# EAGLE board Analog_Scaling_Circuit_Manual (EAGLE 9.3.0)
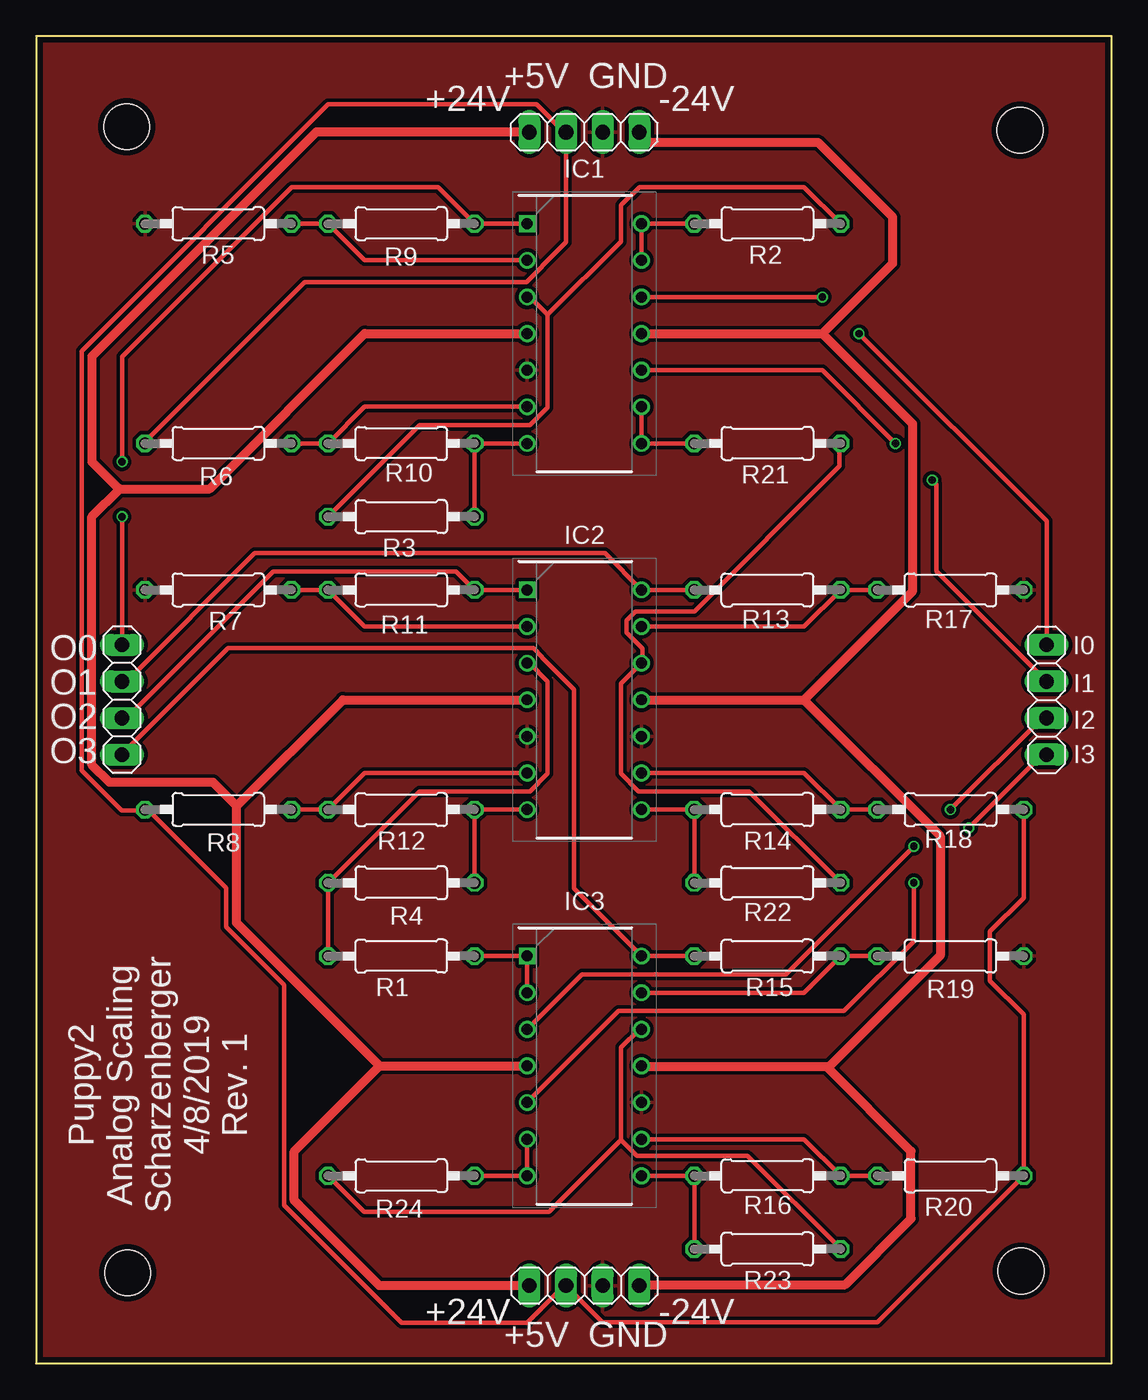
[diagram p0: board, top side]
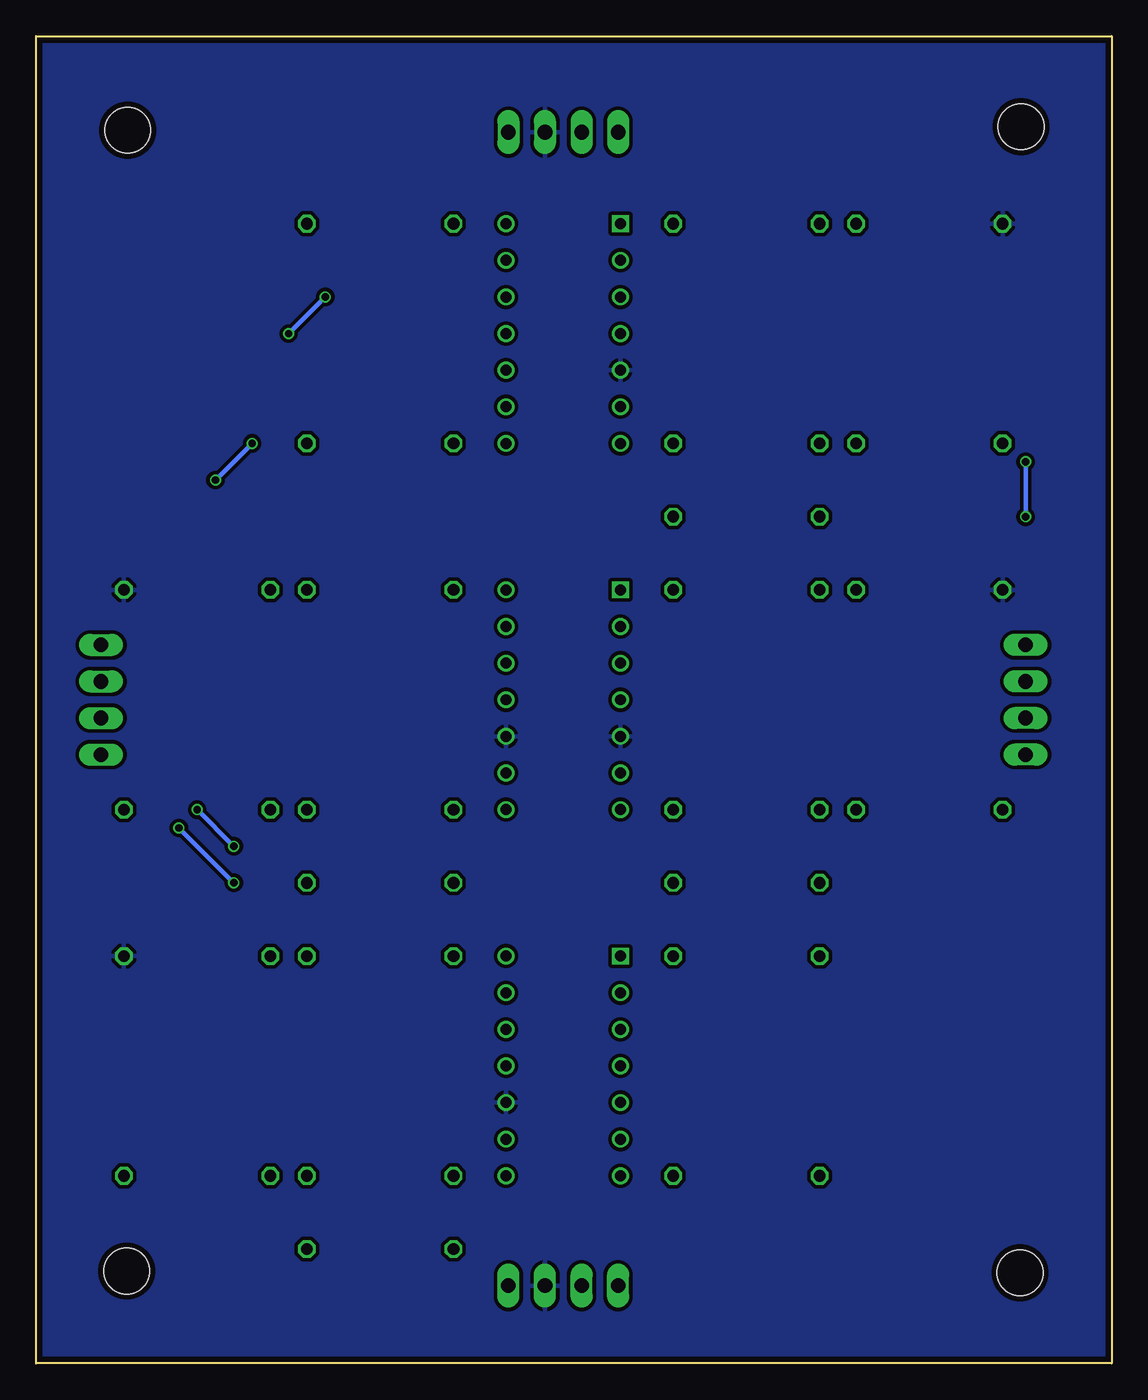
[diagram p1: board, bottom side, seen from below]

Size 74.61 x 92.08 mm. Coordinates in mm from the lower left corner, seen from the top.
Outline: 0,0 74.61,0 74.61,92.08 0,92.08 0,0
Copper layers (1*16): Top 0.035559375mm / dielectric 1.6mm / Bottom 0.035559375mm
Design rules "oshpark-2layer": minimum track width 6mil, minimum drill 10mil, track to track 6mil, track to pad 6mil, pad to pad 6mil, via to via 6mil, smd to smd 6mil, copper to edge 15mil, drill to drill 6mil, minimum pad ring 5mil, minimum via ring 5mil, stop-mask expansion 2.5mil, vias tented up to drill 0mil, thermal gap 10mil
Net classes: 0 default: width 0.305 mm, drill 0.508 mm, clearance 0.254 mm
Holes 3.17 mm at 6.35,6.29 68.33,6.41 6.29,85.79 68.26,85.53

## Footprints (pad centres in the part's own frame; a part is rotated, then mirrored left to right if it is on the bottom)
DIP794W56P254L1905H533Q14N = drill 0.759 pad 1.159 square: 1 -3.969,7.62 | drill 0.759 pad 1.159: 2 -3.969,5.08; 3 -3.969,2.54; 4 -3.969,0; 5 -3.969,-2.54; 6 -3.969,-5.08; 7 -3.969,-7.62; 8 3.969,-7.62; 9 3.969,-5.08; 10 3.969,-2.54; 11 3.969,0; 12 3.969,2.54; 13 3.969,5.08; 14 3.969,7.62
1X04 = drill 1.016 long: 1 -3.81,0; 2 -1.27,0; 3 1.27,0; 4 3.81,0
0207/10 = drill 0.813 octagon: 1 -5.08,0; 2 5.08,0

## Placement (x,y rotation side)
IC1  LM324N  [DIP794W56P254L1905H533Q14N]  38.04,71.44 0 top
IC2  LM324N  [DIP794W56P254L1905H533Q14N]  38.04,46.04 0 top
IC3  LM324N  [DIP794W56P254L1905H533Q14N]  38.04,20.64 0 top
JP1  [1X04]  5.97,46.04 270 top
JP2  [1X04]  38.04,85.41 180 top
JP3  [1X04]  38.04,5.4 0 top
JP4  [1X04]  70.1,46.04 90 top
R1  3.3 kO  [0207/10]  25.34,28.26 0 top
R2  3.3 kO  [0207/10]  50.74,79.06 180 top
R3  4.7 kO  [0207/10]  25.34,58.74 180 top
R4  4.7 kO  [0207/10]  25.34,33.34 180 top
R5  3.3 kO  [0207/10]  12.64,79.06 180 top
R6  33 kO  [0207/10]  12.64,63.82 180 top
R7  3.3 kO  [0207/10]  12.64,53.66 180 top
R8  33 kO  [0207/10]  12.64,38.42 180 top
R9  4.7 kO  [0207/10]  25.34,79.06 180 top
R10  5.6 kO  [0207/10]  25.34,63.82 0 top
R11  4.7 kO  [0207/10]  25.34,53.66 180 top
R12  5.6 kO  [0207/10]  25.34,38.42 0 top
R13  4.7 kO  [0207/10]  50.74,53.66 0 top
R14  5.6 kO  [0207/10]  50.74,38.42 0 top
R15  4.7 kO  [0207/10]  50.74,28.26 0 top
R16  5.6 kO  [0207/10]  50.74,13.02 0 top
R17  3.3 kO  [0207/10]  63.44,53.66 0 top
R18  33 kO  [0207/10]  63.44,38.42 180 top
R19  3.3 kO  [0207/10]  63.44,28.26 0 top
R20  33 kO  [0207/10]  63.44,13.02 180 top
R21  3.3 kO  [0207/10]  50.74,63.82 180 top
R22  4.7 kO  [0207/10]  50.74,33.34 0 top
R23  4.7 kO  [0207/10]  50.74,7.94 0 top
R24  3.3 kO  [0207/10]  25.34,13.02 180 top

## Library data of the parts
IC1-IC3 = SamacSys_Parts; DESCRIPTION: OP Amp Quad GP 16V/32V 14-Pin PDIP Texas Instruments LM324N, Quad Op Amp, 1.2MHz, 5 28 V, 14-Pin PDIP; HEIGHT: 5.334mm; MANUFACTURER_NAME: Texas Instruments; MANUFACTURER_PART_NUMBER: LM324N; MOUSER_PART_NUMBER: 595-LM324N
JP1-JP4 = pinhead
R1-R24 = rcl; SPICEPREFIX: R

## Nets
+5V: JP2.3 JP3.2 R6.2 R8.2 R18.1 R20.1
+24V: IC1.4 IC2.4 IC3.4 JP2.4 JP3.1
-24V: IC1.11 IC2.11 IC3.11 JP2.1 JP3.4
GND: IC1.5 IC2.5 IC2.10 IC3.10 JP2.2 JP3.3 R5.2 R7.2 R17.2 R19.2
IN0: IC1.12 JP4.4
IN1: IC1.10 JP4.3
IN2: IC3.3 JP4.2
IN3: IC3.5 JP4.1
N$16: IC1.13 IC1.14 R2.2
N$17: IC1.6 R6.1 R10.1
N$18: IC1.7 R3.1 R10.2
N$19: IC1.3 R2.1 R3.2
N$20: IC1.2 R5.1 R9.2
N$23: IC2.6 R8.1 R12.1
N$24: IC2.7 R4.1 R12.2
N$25: IC2.3 R1.1 R4.2
N$26: IC2.2 R7.1 R11.2
N$29: IC1.8 IC1.9 R21.2
N$30: IC2.13 R13.2 R17.1
N$31: IC3.1 IC3.2 R1.2
N$32: IC2.12 R21.1 R22.2
N$33: IC2.9 R14.2 R18.2
N$34: IC2.8 R14.1 R22.1
N$35: IC3.13 R15.2 R19.1
N$36: IC3.12 R23.2 R24.2
N$37: IC3.9 R16.2 R20.2
N$38: IC3.8 R16.1 R23.1
N$39: IC3.6 IC3.7 R24.1
OUT0: IC1.1 JP1.1 R9.1
OUT1: IC2.14 JP1.2 R13.1
OUT2: IC2.1 JP1.3 R11.1
OUT3: IC3.14 JP1.4 R15.1

## Tracks (layer width: path | path; a pad name or v marks a point on that pad's centre or on a via)
+5V
  Top 0.305: R18.1 68.52,32.31 66.18,29.97 66.18,26.55 68.52,24.21 R20.1 58.36,2.86 39.31,2.86 JP3.2 36.64,5.4 34.08,2.83 25.35,2.83 17.21,10.97 17.21,26.25 13.2,30.26 13.2,32.97 7.75,38.42 R8.2 7.49,38.35 5.96,38.35 3.16,41.15 3.16,70.24 20.26,87.34 34.71,87.34 36.64,85.41 JP2.3 36.77,77.79 35.11,76.13 35.11,76.09 34.04,75.02 18.64,75.02 7.56,63.93 R6.2
+24V
  Top 0.305: 5.75,60.67 5.8,60.67
  Top 0.61: 23.83,20.64 17.92,14.73 17.92,11.31 23.83,5.4 JP3.1 | 23.83,20.64 IC3.4 | 23.83,20.64 13.91,30.56 13.91,38.66 | 13.91,38.66 21.29,46.04 IC2.4 | 13.91,38.66 12.26,40.32 5.08,40.32 3.87,41.53 3.87,58.74 5.8,60.67 12.03,60.67 22.8,71.44 IC1.4 | JP2.4 19.43,85.41 3.87,69.85 3.87,62.55 5.75,60.67
-24V
  Top 0.305: 54.99,20.56 54.86,20.56 | JP3.4 41.92,5.47
  Top 0.61: IC3.11 42.08,20.56 54.86,20.56 60.69,14.73 60.69,10.04 56.13,5.47 41.92,5.47 | 54.99,20.56 62.73,28.3 62.73,36.59 53.28,46.04 | JP2.1 42.56,84.7 54.23,84.7 59.42,79.5 59.42,76.31 54.55,71.44 | 54.55,71.44 60.82,65.16 60.82,53.58 53.28,46.04 | IC2.11 53.28,46.04 | IC1.11 54.55,71.44
GND
  pour Top: -1.27,92.71 -1.27,-1.27 76.2,-1.27 76.2,92.71
  pour Bottom: -1.27,92.71 -1.27,-1.27 76.2,-1.27 76.2,92.71
IN0  (via drill 0.51)
  Top 0.305: JP4.4 70.1,58.42 v57.09,71.44 | v54.55,73.98 IC1.12
  Bottom 0.305: v54.55,73.98 v57.09,71.44
IN1  (via drill 0.51)
  Top 0.305: IC1.10 54.55,68.9 v59.63,63.82 | JP4.3 62.46,54.95 62.46,60.98 v62.17,61.28
  Bottom 0.305: v59.63,63.82 v62.17,61.28
IN2  (via drill 0.51)
  Top 0.305: IC3.3 37.88,26.99 52.01,26.99 v60.9,35.88 | JP4.2 69.79,44.77 v63.44,38.42
  Bottom 0.305: v60.9,35.88 v63.44,38.42
IN3  (via drill 0.51)
  Top 0.305: IC3.5 40.42,24.45 56.05,24.45 60.9,29.29 v60.9,33.34 | JP4.1 69.79,42.23 v64.71,37.15
  Bottom 0.305: v60.9,33.34 v64.71,37.15
N$16
  Top 0.305: R2.2 IC1.14 IC1.13
N$17
  Top 0.305: R6.1 R10.1 22.8,66.36 IC1.6
N$18
  Top 0.305: IC1.7 R10.2 R3.1
N$19
  Top 0.305: R3.2 26.61,65.09 34.27,65.09 35.5,66.32 35.5,72.75 | IC1.3 34.27,73.98 35.5,72.75 | R2.1 53.28,81.6 41.85,81.6 40.58,80.33 40.58,77.83 35.5,72.75
N$20
  Top 0.305: IC1.2 22.8,76.52 R9.2 R5.1
N$23
  Top 0.305: IC2.6 22.8,40.96 R12.1 R8.1
N$24
  Top 0.305: IC2.7 R12.2 R4.1
N$25
  Top 0.305: R1.1 R4.2 26.61,39.69 34.27,39.69 35.5,40.92 35.5,47.31 34.23,48.58 IC2.3
N$26
  Top 0.305: IC2.2 22.8,51.12 R11.2 R7.1
N$29
  Top 0.305: R21.2 IC1.8 IC1.9
N$30
  Top 0.305: IC2.13 53.28,51.12 R13.2 R17.1
N$31
  Top 0.305: R1.2 IC3.1 IC3.2
N$32
  Top 0.305: R22.2 49.47,39.69 41.8,39.69 40.58,40.92 40.58,47.15 IC2.12 42.05,48.62 42.05,49.6 40.97,50.69 40.97,51.55 41.58,52.16 45.66,52.16 55.74,62.23 55.74,63.74 R21.1
N$33
  Top 0.305: IC2.9 53.28,40.96 R14.2 R18.2
N$34
  Top 0.305: IC2.8 R14.1 R22.1
N$35
  Top 0.305: IC3.13 53.28,25.72 R15.2 R19.1
N$36
  Top 0.305: 40.58,15.52 41.7,14.39 49.36,14.39 R23.2 | 40.58,15.52 40.58,21.91 41.85,23.18 IC3.12 | 40.58,15.52 35.59,10.53 22.75,10.53 R24.2
N$37
  Top 0.305: R20.2 R16.2 53.28,15.56 IC3.9
N$38
  Top 0.305: IC3.8 R16.1 R23.1
N$39
  Top 0.305: R24.1 IC3.7 IC3.6
OUT0  (via drill 0.51)
  Top 0.305: IC1.1 R9.1 27.88,81.6 17.72,81.6 5.97,69.85 v5.97,62.55 | v5.97,58.74 JP1.1
  Bottom 0.305: v5.97,62.55 v5.97,58.74
OUT1
  Top 0.305: R13.1 IC2.14 39.47,56.2 15.18,56.2 6.29,47.31 JP1.2
OUT2
  Top 0.305: IC2.1 R11.1 29.15,54.93 16.45,54.93 6.29,44.77 JP1.3
OUT3
  Top 0.305: R15.1 IC3.14 37.33,32.94 37.33,46.75 35.11,48.97 35.11,49.01 34.5,49.62 13.32,49.62 5.97,42.27 JP1.4

## Text on the board
tPlace: +5V | GND | +24V | -24V | I0 | O0 | I1 | O1 | I2 | O2 | O3 | I3 | Puppy2 / Analog Scaling / Scharzenberger / 4/8/2019 / Rev. 1 | +24V | -24V | +5V | GND